# EAGLE board 02-Led and Button v2 (EAGLE 9.7.0)
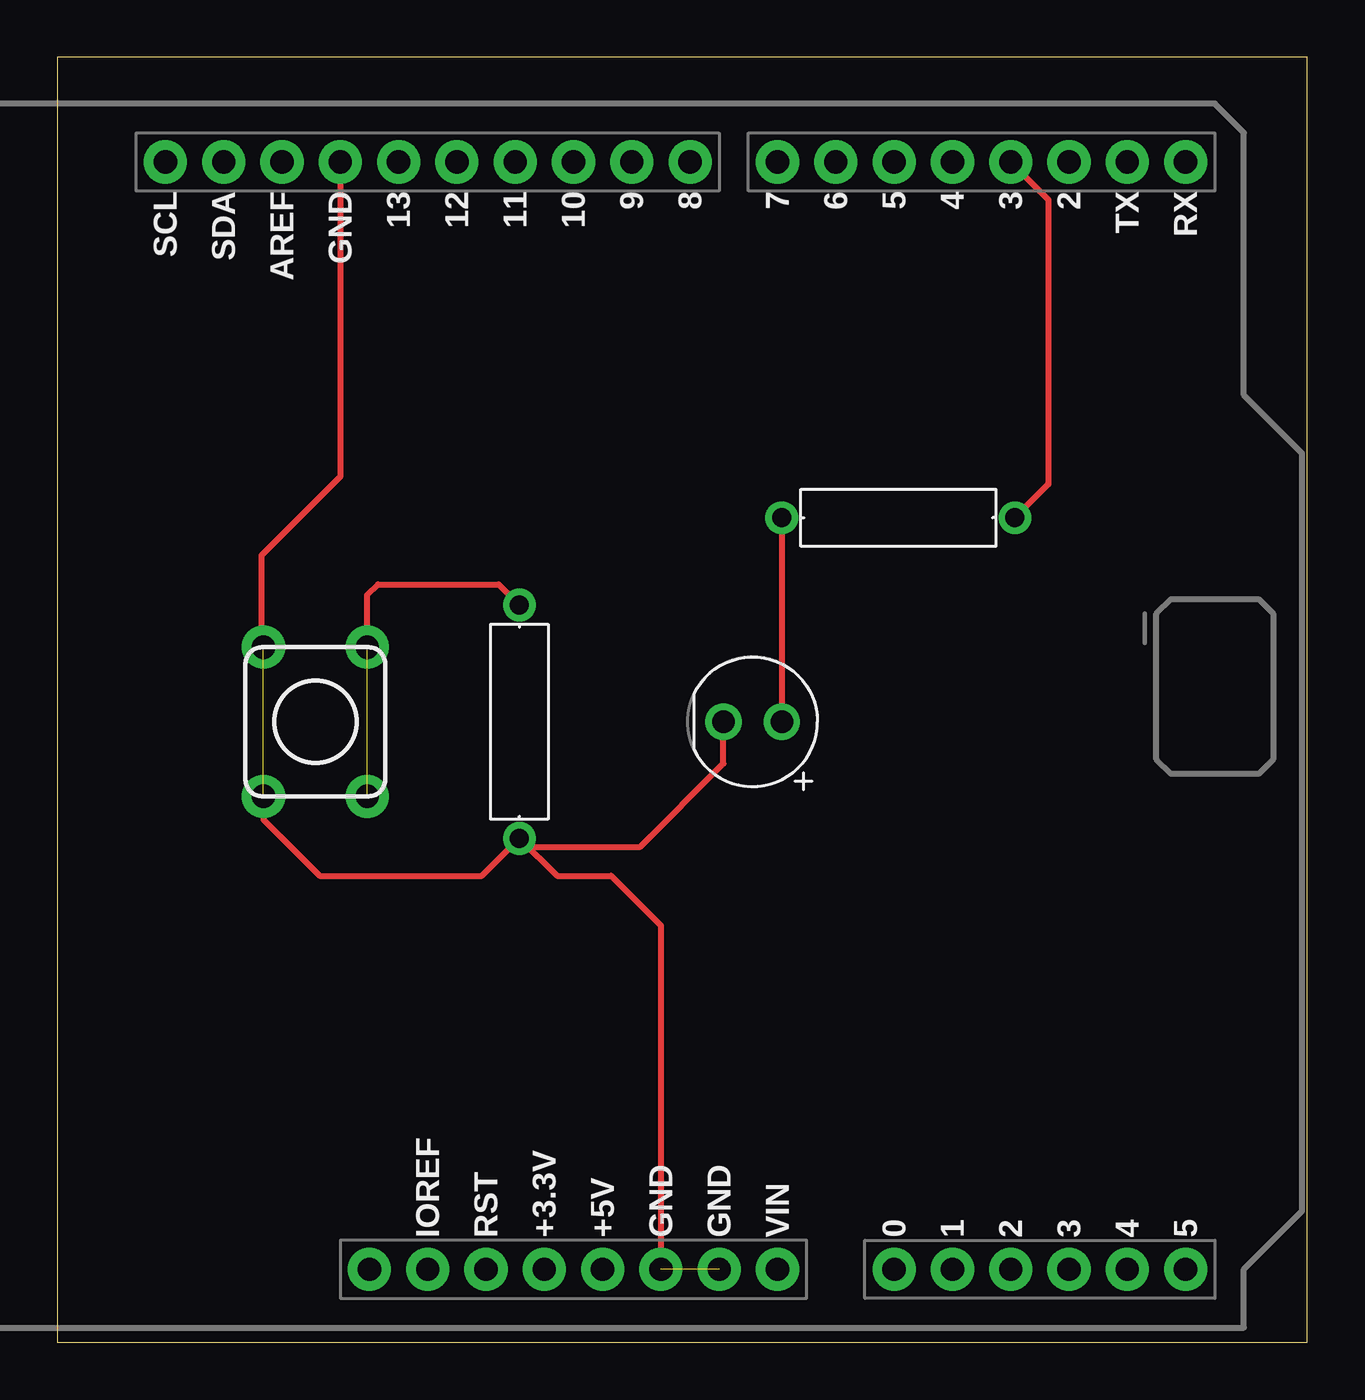
[diagram p0: board, top side]
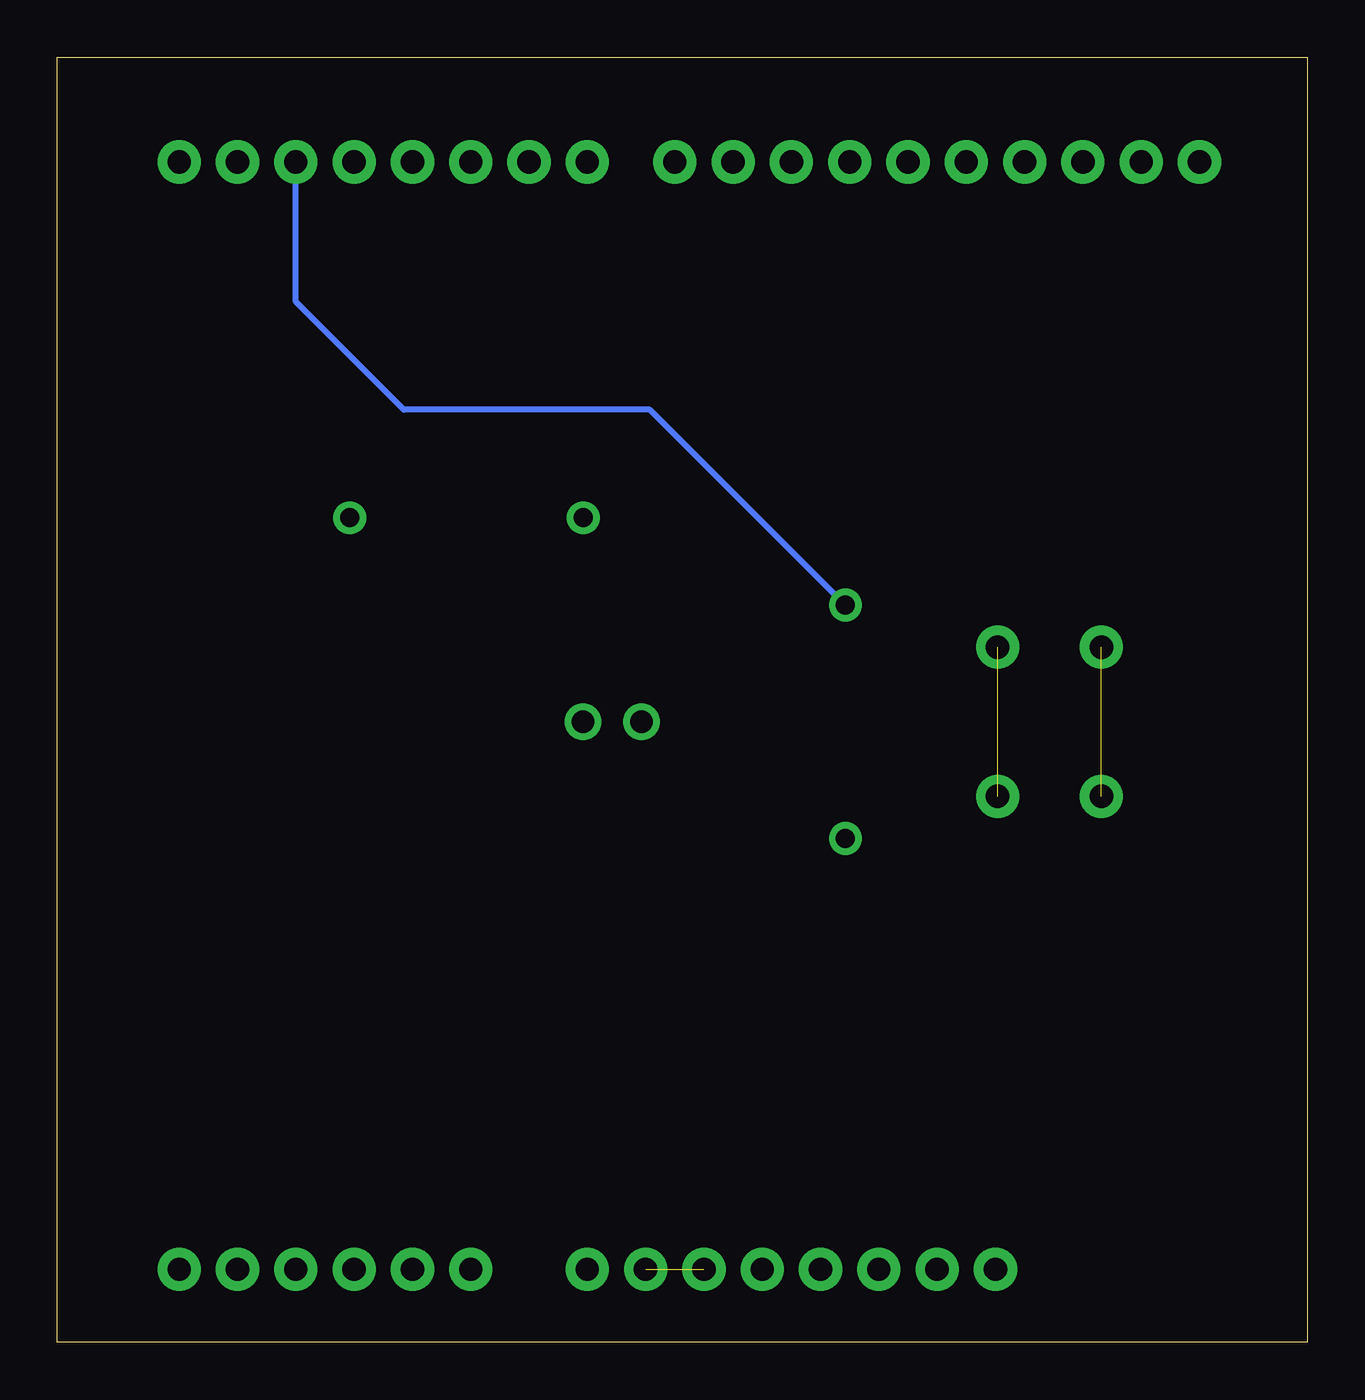
[diagram p1: board, bottom side, seen from below]

Size 54.46 x 55.99 mm. Coordinates in mm from the lower left corner, seen from the top.
Outline: 0,0 54.46,0 54.46,55.99 0,55.99 0,0
Copper layers (1*16): Top 0.035mm / dielectric 1.5mm / Bottom 0.035mm
Design rules "default": minimum track width 6mil, minimum drill 0.35mm, track to track 6mil, track to pad 6mil, pad to pad 6mil, via to via 6mil, smd to smd 6mil, copper to edge 40mil, drill to drill 6mil, minimum pad ring 10mil, minimum via ring 8mil, stop-mask expansion 4mil, vias tented up to drill 0mil, thermal gap 10mil

## Footprints (pad centres in the part's own frame; a part is rotated, then mirrored left to right if it is on the bottom)
LEDRD254W60D565H860B = drill 0.981 pad 1.581: 1 -1.27,0; 2 1.27,0
RESAD1016W63L850D250B = drill 0.83 pad 1.43: 1 -5.08,0; 2 5.08,0
SWITCH-MOMENTARY-PTH-6.5MM = drill 1.016 pad 1.88: 1 -3.251,2.261; 2 3.251,2.261; 3 -3.251,-2.261; 4 3.251,-2.261
ARDUINO-UNO-R3-SHIELD = drill 1.016 pad 1.88: 3.3V 24.13,-2.54; 5V 24.13,0; A0 24.13,12.7; A1 24.13,15.24; A2 24.13,17.78; A3 24.13,20.32; A4 24.13,22.86; A5 24.13,25.4; AREF -24.13,-13.97; D2 -24.13,20.32; D3 -24.13,17.78; D4 -24.13,15.24; D5 -24.13,12.7; D6 -24.13,10.16; D7 -24.13,7.62; D8 -24.13,3.81; D9 -24.13,1.27; D10 -24.13,-1.27; D11 -24.13,-3.81; D12 -24.13,-6.35; D13 -24.13,-8.89; GND@0 24.13,2.54; GND@1 24.13,5.08; GND@2 -24.13,-11.43; IOREF 24.13,-7.62; NC 24.13,-10.16; RES 24.13,-5.08; RX -24.13,25.4; SCL -24.13,-19.05; SDA -24.13,-16.51; TX -24.13,22.86; VIN 24.13,7.62

## Placement (x,y rotation side)
D1  RED  [LEDRD254W60D565H860B]  30.29,27.04 180 top
R1  1k  [RESAD1016W63L850D250B]  36.64,35.93 180 top
R2  1k  [RESAD1016W63L850D250B]  20.13,27.04 90 top
S1  SWITCH_MOMENTARY  [SWITCH-MOMENTARY-PTH-6.5MM]  11.24,27.04 90 top
U1  ARDUINO-UNO-R3-SHIELD  [ARDUINO-UNO-R3-SHIELD]  23.75,27.3 270 top

## Library data of the parts
D1 = Tinkercad; CATEGORY: Opto-Electronic; SUB-CATEGORY: LED; VALUE: LED_RED
R1 R2 S1 U1 = Tinkercad

## Nets
D1_A: D1.1 R1.2
U1_D2: R2.2 S1.3 S1.4 U1.D2
U1_D3: R1.1 U1.D3
U1_GND: D1.2 R2.1 S1.1 S1.2 U1.GND@0 U1.GND@1 U1.GND@2

## Tracks (layer width: path | path; a pad name or v marks a point on that pad's centre or on a via)
D1_A
  Top 0.254: R1.2 D1.1
U1_D2  (1 unrouted)
  Top 0.254: S1.4 13.5,32.55 13.97,33.02 19.23,33.02 R2.2
  Bottom 0.254: R2.2 28.65,40.64 39.37,40.64 44.08,45.34 U1.D2
U1_D3
  Top 0.254: U1.D3 43.18,49.79 43.18,37.39 R1.1
U1_GND  (2 unrouted)
  Top 0.254: U1.GND@2 12.32,37.73 8.89,34.29 8.89,30.38 S1.2 | S1.1 8.98,22.77 11.43,20.32 18.49,20.32 R2.1 | R2.1 20.5,21.59 25.4,21.59 29.02,25.21 D1.2 | R2.1 21.77,20.32 24.13,20.32 26.29,18.16 U1.GND@0